# Altium PCB powermeter_Radio.PcbDoc
Units mm, origin at the board's own origin, x right, y up, seen from the top; angles counter-clockwise.
Board outline 27 x 38.5 mm, 2 copper layers (Top Layer, Bottom Layer); 30 components, 50 nets, 122 pads, 185 vias.
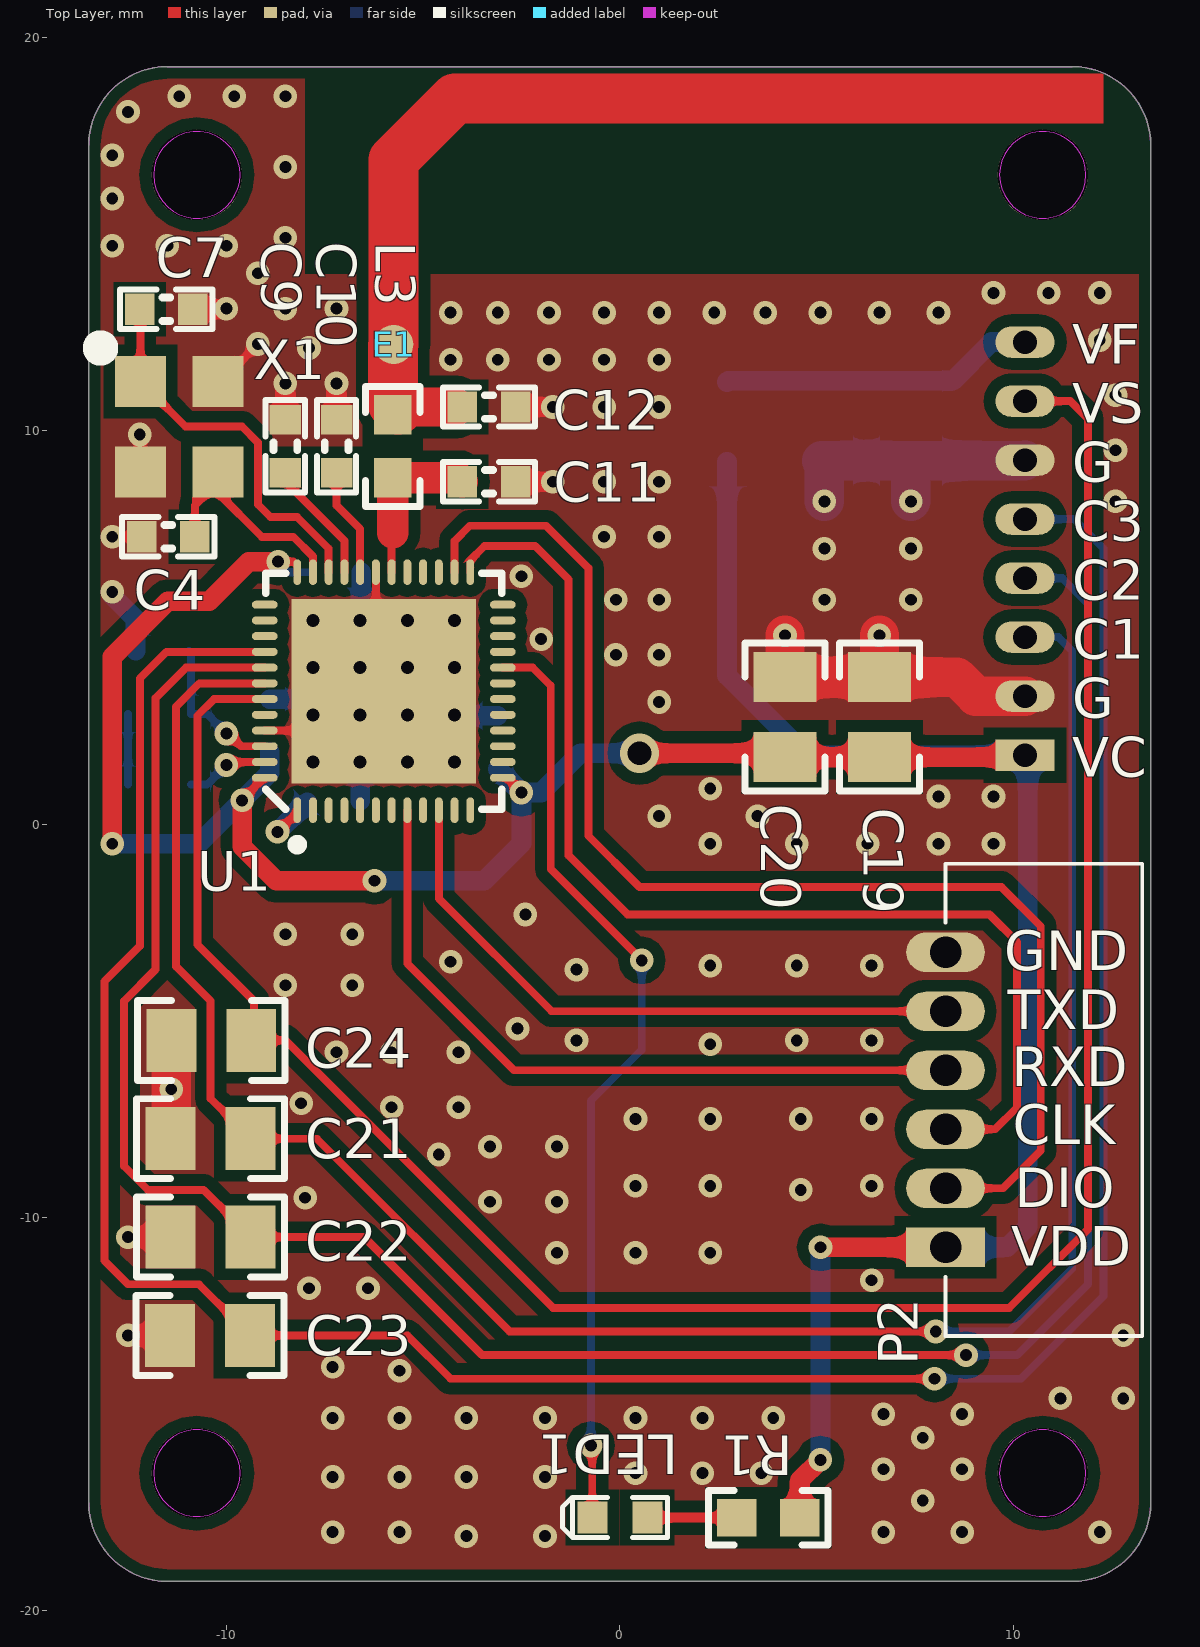
[diagram p0: Top Layer view]
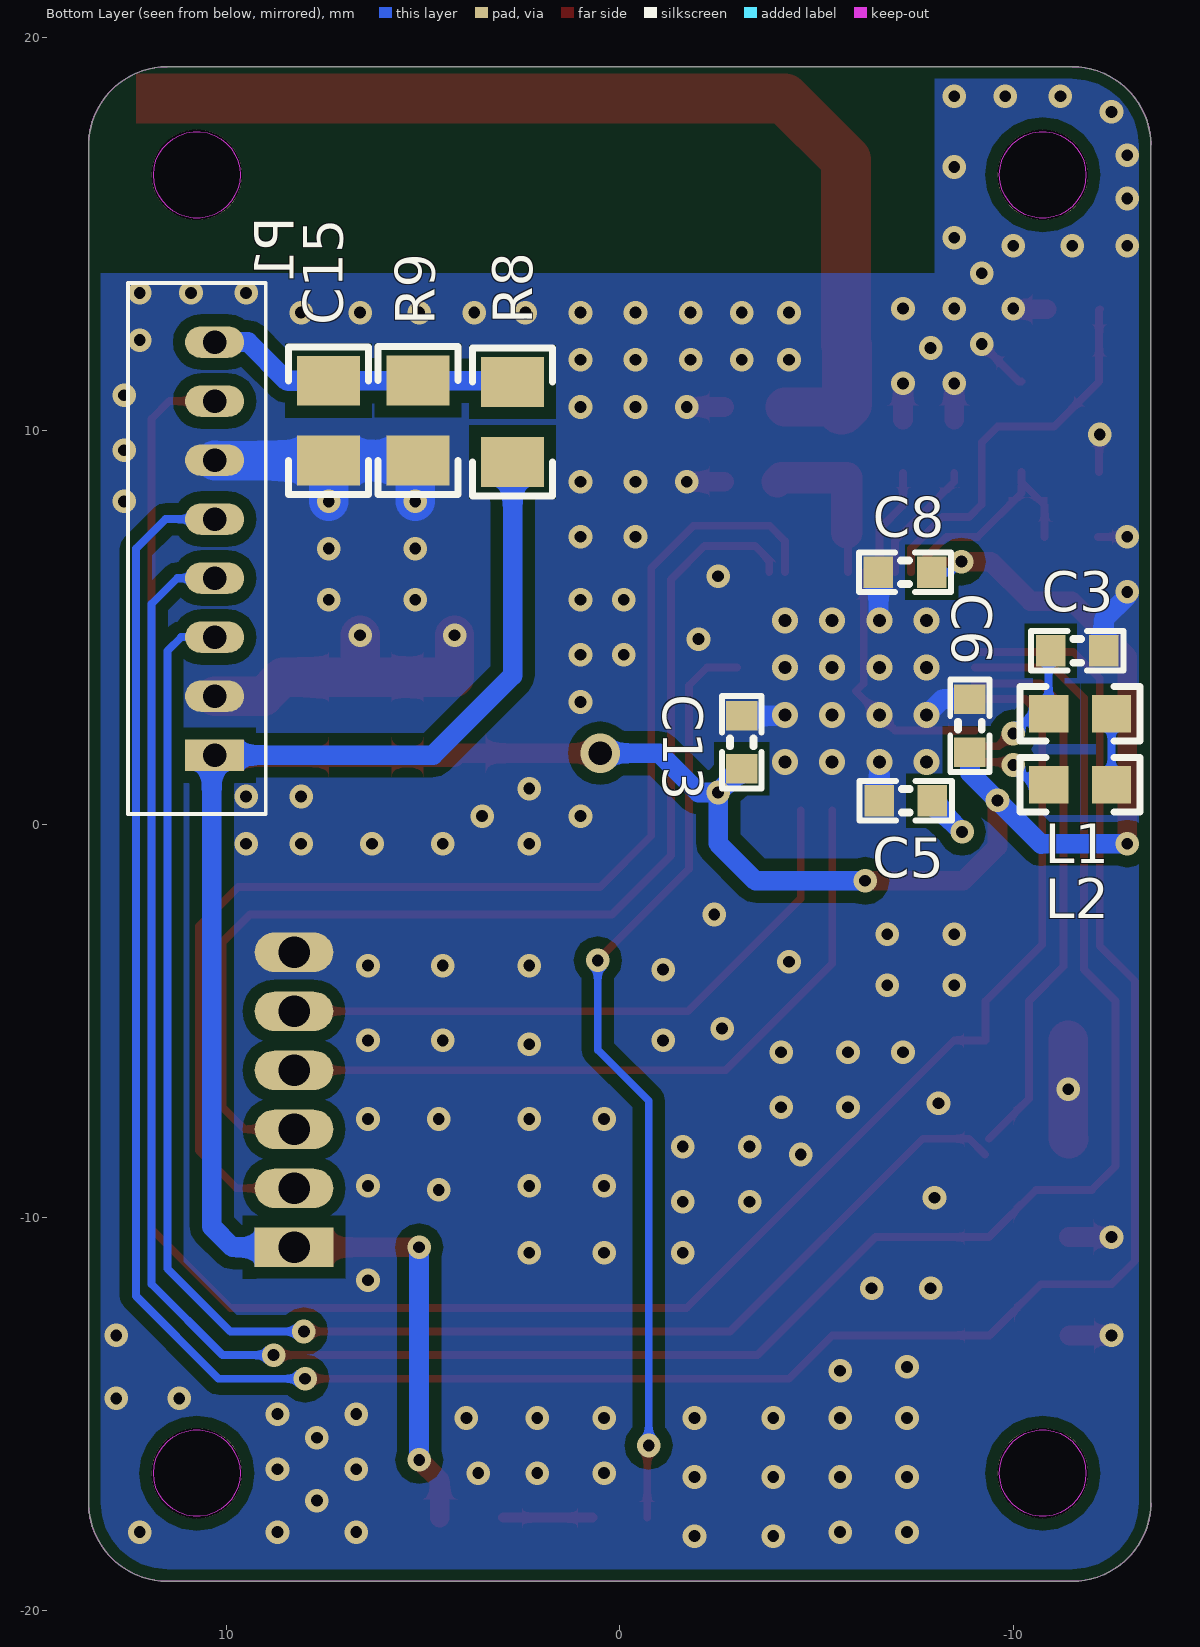
[diagram p1: Bottom Layer view, seen from below]

## Layer stack, top to bottom
Top Solder: solder mask 0.0102, Solder Resist, Dk 3.5
Top Layer: signal copper 0.0356
Dielectric 1: dielectric 0.32, FR-4, Dk 4.8
Bottom Layer: signal copper 0.0356
Bottom Solder: solder mask 0.0102, Solder Resist, Dk 3.5

## Board outline
-11.5,-19.25 cw(c-11.5,-17.25) -13.5,-17.25 -13.5,17.25 cw(c-11.5,17.25) -11.5,19.25 11.5,19.25 cw(c11.5,17.25) 13.5,17.25 13.5,-17.25 cw(c11.5,-17.25) 11.5,-19.25

## Design rules (kind name [scope] priority, off if disabled: settings)
Clearance polygon [IsRegion] p1: gap=0.3
Clearance [All] p2: gap=0.2
MinimumSolderMaskSliver [All] p1: minsoldermaskwidth=0.1
PolygonConnect [All] p1: connectstyle=Direct reliefconductorwidth=0.254 reliefentries=4 polygonreliefangle="90 Angle" airgapwidth=0.254
RoutingVias [All] p1: holewidth=0.3 width=0.6 viastyle="Through Hole" minholewidth=0.3 minwidth=0.6 maxholewidth=5 maxwidth=5
SilkToSilkClearance [All] p1: silktosilkclearance=0.1
SilkToSolderMaskClearance [IsPad] p1: minsilkscreentomaskgap=0.01 clearancetoexposedcopper=TRUE
SolderMaskExpansion [All] p1: expansion=0.102
Width [All] p1: maxlimit=5 minlimit=0.2 preferedwidth=0.254
27 further rules are at their usual default settings.

## Components (designator, comment, footprint, x,y, rotation, side; value= is the part's Value field where it differs from the comment)
C3 "1.0µF" CAPC1608X06L -11.625,4.4 r0 bottom
C4 "12pF" CAPC1608X06L -11.475,7.3 r180 top
C5 "100nF" CAPC1608X06L -7.27,0.59 r0 bottom
C6 "4.7µF" CAPC1608X06L -8.9,2.5 r90 bottom
C7 "12pF" CAPC1608X06L -11.528,13.083 r0 top
C8 "100nF" CAPC1608X06L -7.25,6.4 r0 bottom
C9 "100pF" CAPC1608X06L -8.5,9.6 r90 top
C10 "N.C." CAPC1608X06L -7.2,9.6 r90 top
C11 "0.8pF" CAPC1608X06L -3.325,8.7 r180 top
C12 "1.2pF" CAPC1608X06L -3.325,10.6 r0 top
C13 "100nF" CAPC1608X06L -3.1,2.075 r90 bottom
C15 "106" 0805_HV 7.404,10.251 r90 bottom
C19 "100nF" 0805_HV 6.6,2.716 r270 top
C20 "100nF" 0805_HV 4.2,2.716 r270 top
C21 "100nF" 0805_HV -10.4,-8 r0 top
C22 "100nF" 0805_HV -10.4,-10.5 r0 top
C23 "100nF" 0805_HV -10.416,-13 r0 top
C24 "100nF" 0805_HV -10.384,-5.5 r0 top
E1 "Antenna" nrfant -5.75,12.19 r0 top locked
L1 "15nH" 0603 -11.7,2.8 r180 bottom
L2 "10µH" 0603 -11.7,1 r0 bottom
L3 "3.9nH" 0603 -5.77,9.6 r90 top
LED1 "L0603G" LED_0603_G 0,-17.625 r0 top
P1 "Header 8" CON6_1.5D 10.3,1.75 r90 bottom locked
P2 "Header 6" CON6P-ZH1.5 8.28,-10.76 r90 top locked
R1 "220R" 0603 3.773,-17.632 r0 top
R8 "1K" 0805_HV 2.725,10.22 r270 bottom
R9 "2.2K" 0805_HV 5.133,10.253 r270 bottom
U1 "nRF52832-QFAA" QFN40P600X600X90-48N -6,3.375 r90 top locked
X1 "CX3225SB32000D0FFFCC" SON230P260X60-4N -11.2,10.1 r0 top locked

## Footprints (in the part's own frame and the unit in brackets; to place one, negate y for a bottom-side part, rotate by r counter-clockwise, add the part's x,y. Pads: shape width x height; smd on the part's side, far side on the other; paste and mask are expansions set on the pad)
0603 [mm] "0603 from SM-752 data"
  rect 1x0.95 smd: 1(-0.8,0) 2(0.8,0)
  silkscreen extent -1.52,-0.69 1.52,0.69, body extent -0.87,-0.47 0.87,0.47, height 1
0805_HV [mil] "0805 with 30mil clearance between pads"
  rect 50x63 smd: 1(-40,0) 2(40,0)
  silkscreen extent -74,-40 74,40, body extent -43,-29 43,29, height 57
CAPC1608X06L [mm]
  rect 0.75x0.8 smd: 1(-0.675,0) 2(0.675,0)
  silkscreen extent -1.17,-0.5 1.17,0.5, body extent -0.8,-0.43 0.8,0.43, height 0.8
CON6_1.5D [mm]
  rect 0.8x1.5 hole 0.6 paste+0: 1(0,0)
  oval 0.8x1.5 hole 0.6 paste+0: 2(1.5,0) 3(3,0) 4(4.5,0) 5(6,0) 6(7.5,0) 7(9,0) 8(10.5,0)
  silkscreen extent -1.5,-1.3 12,2.2
CON6P-ZH1.5 [mm] "CON6"
  rect 1x2 hole 0.8 paste+0: 1(0,0)
  oval 1x2 hole 0.8 paste+0: 2(1.5,0) 3(3,0) 4(4.5,0) 5(6,0) 6(7.5,0)
  silkscreen extent -2.25,-5 9.75,0
LED_0603_G [mil]
  rect 30x32 smd: 1(-27.5,0) 2(27.5,0)
  silkscreen extent -58,-20 48,20, body extent -32,-16 32,16, height 24
nrfant [mm]
  round 1 smd: 1(0,0)
  Top Layer region: 18.048,5.617 18.048,6.887 17.286,6.887 17.286,5.617
  Top Layer lines w1.27: 0,0 0,4.689 ; 17.401,6.248 1.559,6.248 1.559,6.248 0,4.689 ; 0,4.689 0,4.689
QFN40P600X600X90-48N [mm]
  oval 0.65x0.2 smd: 1(-3.025,2.2) 2(-3.025,1.8) 3(-3.025,1.4) 4(-3.025,1) 5(-3.025,0.6) 6(-3.025,0.2) 7(-3.025,-0.2) 8(-3.025,-0.6) 9(-3.025,-1) 10(-3.025,-1.4) 11(-3.025,-1.8) 12(-3.025,-2.2) 25(3.025,-2.2) 26(3.025,-1.8) 27(3.025,-1.4) 28(3.025,-1) 29(3.025,-0.6) 30(3.025,-0.2) 31(3.025,0.2) 32(3.025,0.6) 33(3.025,1) 34(3.025,1.4) 35(3.025,1.8) 36(3.025,2.2)
  oval 0.2x0.65 smd: 13(-2.2,-3.025) 14(-1.8,-3.025) 15(-1.4,-3.025) 16(-1,-3.025) 17(-0.6,-3.025) 18(-0.2,-3.025) 19(0.2,-3.025) 20(0.6,-3.025) 21(1,-3.025) 22(1.4,-3.025) 23(1.8,-3.025) 24(2.2,-3.025) 37(2.2,3.025) 38(1.8,3.025) 39(1.4,3.025) 40(1,3.025) 41(0.6,3.025) 42(0.2,3.025) 43(-0.2,3.025) 44(-0.6,3.025) 45(-1,3.025) 46(-1.4,3.025) 47(-1.8,3.025) 48(-2.2,3.025)
  rect 4.7x4.7 smd: 49(0,0)
  silkscreen extent -4.02,-3 3,3, body extent -3.02,-3.02 3.02,3.02, height 0.86
SON230P260X60-4N [mm] "SON, 4-Leads, Body 3.25x2.55mm, Pitch 2.30mm, IPC Medium Density"
  rect 1.3x1.3 smd: 1(-0.985,1.15) 2(-0.985,-1.15) 3(0.985,-1.15) 4(0.985,1.15)
  silkscreen extent -2.2,1.8 -1.8,2.2, body extent -1.3,-1.65 1.3,1.65, height 0.6

## Part data
C3: library part C0603-1µ0, "Capacitor, X7R, ±10%"
C4 C7: library part C0402-12p, "Capacitor, NP0, ±2%"
C5 C8 C13 C19 C20 C21 C22 C23 C24: library part C0402-100n, "Capacitor, X7R, ±10%"
C6: library part C0603-4µ7, "Capacitor, X5R, ±10%"
C9: library part C0402-100p, "Capacitor, NP0, ±5%"
C10: library part C0402-N.C., "Not mounted"
C11: library part C0402-0.8p, "Capacitor, NP0, ±5%"
C12: library part C0402-1.2p, "Capacitor, NP0, ±0.1pF"
C15: library part CM, "Cap SMD"
E1: "Generic Antenna"
L1: library part L0402-15n, "Inductor, 320mA, ±5%"
L2: library part L0603-10µ, "Inductor, 80mA, ±10%"
L3: library part L0402-3n9, "Inductor, 170mA, ±0.1nH"
LED1: library part "LG L29K Smartled Green", "LED SMARTLED GREEN 570NM 0603"
P1: "Header, 8-Pin"
P2: "Header, 6-Pin"
R1: library part R0402-220, "Resistor, ±1%, 0.063W"
R8 R9: library part R0402-100k, "Resistor, ±1%, 0.063W"
U1: "Multi-protocol Bluetooth Low Energy and 2.4GHz proprietary system-on-chip"
X1: library part XTAL_SMD2016_32MHz_8pF_Epson, "XTAL SMD 2016, 32MHz, Cl=8pF, Tol: ±10ppm, Stab: ±10ppm"

## Free pads (board coordinates)
  round 2.3 hole 2.3 paste+0: 0(-10.75,16.5) 1(10.75,16.5) 2(10.75,-16.5) 3(-10.75,-16.5)

## Via types
v1: diameter 0.6, hole 0.3, Top Layer to Bottom Layer, tented both sides, 168 vias
v2: diameter 0.66, hole 0.33, Top Layer to Bottom Layer, tented both sides, 16 vias
v3: diameter 1, hole 0.6, Top Layer to Bottom Layer, tented both sides, 1 vias

## Nets (pads, with @x,y where several pads share a name; then routed paths per layer and width w, separated by ;. In a path a pad name is that pad's centre, name@x,y a point inside that pad or via, vN(x,y) a via of type N, cw(c..) or ccw(c..) an arc to the next point about the centre after c; other vN are vias at no path point)
ANT: C12.1 E1.1 L3.2 | length 3.2
  Top Layer w1: L3.2@-5.635,10.535 -5.57,10.6 C12.1@-4.2,10.6
  Top Layer w1.27: E1.1 -5.77,12.17 -5.77,10.67 L3.2@-5.635,10.535
CTS: 
CURRENT_SIGNAL1: C21.2 P1.3 U1.42 | length 55
  Top Layer w0.2: C21.2 -10.4,-6.984 -10.4,-4.5 -11.281,-3.619 -11.281,2.982 -10.688,3.575 U1.42 ; C21.2@-9.284,-8.4 -8.884,-8 -7.7,-8 -2.8,-12.9 v1(8.029,-12.9)
  Bottom Layer w0.2: v1(8.029,-12.9) 9.9,-12.9 11.5,-11.3 11.5,4.4 11.15,4.75 P1.3
CURRENT_SIGNAL2: C22.2 P1.4 U1.41 | length 61.7
  Top Layer w0.2: U1.41 -11.025,3.975 -11.8,3.2 -11.8,-3.7 -12.6,-4.5 -12.6,-8.7 -12,-9.3 -10.584,-9.3 C22.2 -6.5,-10.5 -3.5,-13.5 v1(8.8,-13.5)
  Bottom Layer w0.2: v1(8.8,-13.5) 10.1,-13.5 11.9,-11.7 11.9,5.6 11.25,6.25 P1.4
CURRENT_SIGNAL3: C23.2 P1.5 U1.40 | length 67.5
  Top Layer w0.2: U1.40 -11.525,4.375 -12.2,3.7 -12.2,-3.1 -13.1,-4 -13.1,-11.1 -12.5,-11.7 -10.7,-11.7 C23.2 -5.4,-13 -4.3,-14.1 v1(8,-14.1)
  Bottom Layer w0.2: v1(8,-14.1) 10.2,-14.1 12.3,-12 12.3,7 11.55,7.75 P1.5
DEC1: C5.1 U1.1 | length 1.9
  Top Layer w0.2: v1(-8.7,-0.2) -8.2,0.3 U1.1
  Bottom Layer w0.2: C5.1@-7.945,0.555 C5.1
  Bottom Layer w0.5: v1(-8.7,-0.2) C5.1@-7.945,0.555
DEC2: C10.1 U1.32 | length 2.8
  Top Layer w0.2: C10.1 -7.2,8.1 -6.6,7.5 U1.32
DEC3: C9.1 U1.33 | length 3.1
  Top Layer w0.2: C9.1 -8.5,8.7 -7,7.2 U1.33
DEC4: C3.2 L1.1 U1.46 | length 3.8
  Top Layer w0.2: v1(-10,2.3) -9.951,2.3 -9.626,1.975 U1.46
  Bottom Layer w0.2: C3.2 -10.9,4.35 L1.1 -10.5,2.8 v1(-10,2.3)
GND: C3.1 C4.2 C5.2 C6.2 C7.2 C8.2 C9.2 C10.2 C11.1 C12.2 C13.2 C15.1 C19.1 C20.1 C21.1 C22.1 C23.1 C24.1 P1.2 P1.6 P2.6 R9.2 U1.31 U1.45 U1.49 X1.2 X1.4 | length 41
  Top Layer w0.2: v1(-12.9,7.3) C4.2 ; v1(-12.2,9.9) -12.185,9.885 X1.2 ; X1.4 -10.15,11.25 v1(-9.2,12.2) ; U1.45 -7,2.375 v2(-6.6,2.775) U1.49 -6.2,3.575 U1.31
  Top Layer w0.5: v1(-12.5,-13) C23.1 ; v1(-12.5,-10.5) C22.1 ; C7.2 -10.017,13.083 v1(-10,13.1) ; C9.2 v1(-8.5,11.2) ; C10.2 v1(-7.2,11.2) ; C11.1 v1(-1.7,8.7) ; C12.2 v1(-1.7,10.6)
  Top Layer w1: C21.1 -11.4,-7.984 v1(-11.4,-6.742) C24.1 ; v1(4.2,4.8) C20.1 C19.1 ; v1(6.6,4.8) C19.1 ; P1.2 9.05,3.25 8.568,3.732 C19.1
  Bottom Layer w0.5: v1(-12.9,5.9) -12.9,5.8 -12.3,5.2 C3.1 ; C6.2 -8.2,3.175 v2(-7.8,2.775) ; v2(-6.6,1.575) -6.595,1.57 C5.2 ; v2(-6.6,5.175) -6.575,5.2 C8.2 ; v2(-4.2,2.775) -4.175,2.75 C13.2
  Bottom Layer w1: v1(5.2,8.2) 5.2,9.17 R9.2 10.287,9.237 P1.6 ; v1(7.4,8.2) 7.4,9.231 C15.1
  other v1: -3.9,-18.1 -1.9,-18.1 -7.3,-18 -5.6,-18 6.7,-18 8.7,-18 12.2,-18 7.7,-17.2 -7.3,-16.6 -5.6,-16.6 -3.9,-16.6 -1.9,-16.6 0.4,-16.5 2.1,-16.5 3.6,-16.5 6.7,-16.4 8.7,-16.4 7.7,-15.6 -7.3,-15.1 -5.6,-15.1 -3.9,-15.1 -1.9,-15.1 0.4,-15.1 2.1,-15.1 3.9,-15.1 6.7,-15 8.7,-15 11.2,-14.6 12.8,-14.6 -5.6,-13.9 -7.3,-13.8 12.8,-13 -7.9,-11.8 -6.4,-11.8 6.4,-11.6 -1.6,-10.9 0.4,-10.9 2.3,-10.9 -3.3,-9.6 -1.6,-9.6 -8,-9.5 4.6,-9.3 0.4,-9.2 2.3,-9.2 6.4,-9.2 -4.6,-8.4 -3.3,-8.2 -1.6,-8.2 0.4,-7.5 2.3,-7.5 4.6,-7.5 6.4,-7.5 -5.8,-7.2 -4.1,-7.2 -8.1,-7.1 -7.2,-5.8 -5.8,-5.8 -4.1,-5.8 2.3,-5.6 -1.1,-5.5 4.5,-5.5 6.4,-5.5 -2.6,-5.2 -8.5,-4.1 -6.8,-4.1 -1.1,-3.7 2.3,-3.6 4.5,-3.6 6.4,-3.6 -4.3,-3.5 -8.5,-2.8 -6.8,-2.8 -2.4,-2.3 2.3,-0.5 4.5,-0.5 6.3,-0.5 8.1,-0.5 9.5,-0.5 1,0.2 3.5,0.2 8.1,0.7 9.5,0.7 2.3,0.9 1,3.1 -0.1,4.3 1,4.3 -2,4.7 -0.1,5.7 1,5.7 5.2,5.7 7.4,5.7 -2.5,6.3 5.2,7 7.4,7 -0.4,7.3 1,7.3 12.6,8.2 -0.4,8.7 1,8.7 12.6,9.5 -0.4,10.6 1,10.6 12.6,10.9 -4.3,11.8 -3.1,11.8 -1.8,11.8 -0.4,11.8 1,11.8 -7.9,12.1 12.2,12.3 -4.3,13 -3.1,13 -1.8,13 -0.4,13 1,13 2.4,13 3.7,13 5.1,13 6.6,13 8.1,13 -8.5,13.1 -7.2,13.1 9.5,13.5 10.9,13.5 12.2,13.5 -9.2,14 -12.9,14.7 -11.5,14.7 -10,14.7 -8.5,14.9 -12.9,15.9 -8.5,16.7 -12.9,17 -12.5,18.1 -11.2,18.5 -9.8,18.5 -8.5,18.5
  other v2: -7.8,1.575 -5.4,1.575 -4.2,1.575 -5.4,2.775 -7.8,3.975 -6.6,3.975 -5.4,3.975 -4.2,3.975 -7.8,5.175 -5.4,5.175 -4.2,5.175
LED1: LED1.1 U1.20 | length 24.1
  Top Layer w0.2: U1.20 -2.213,3.975 -1.755,3.517 -1.755,-1.145 0.591,-3.491 v1@0.591,-3.495 ; v1(-0.735,-15.798) -0.699,-15.834 LED1.1
  Bottom Layer w0.2: v1(-0.735,-15.798) -0.735,-7.035 0.559,-5.741 v1(0.559,-3.466)
NetC11_2: C11.2 L3.1 U1.30 | length 4.2
  Top Layer w0.2: U1.30 -5.8,7.27 -5.77,7.3 -5.77,7.4
  Top Layer w0.8: -5.77,7.4 L3.1 -4.1,8.8 C11.2
NetL1_2: L1.2 L2.1 | length 1.8
  Bottom Layer w0.2: L2.1 L1.2
NetL2_2: L2.2 U1.47 | length 2.1
  Top Layer w0.2: v1(-10,1.5) -9.925,1.575 U1.47
  Bottom Layer w0.2: L2.2 -10.5,1 v1(-10,1.5)
NetLED1_2: LED1.2 R1.1 | length 2.3
  Top Layer w0.254: LED1.2 0.705,-17.632 R1.1
P0.00: U1.2
P0.01: U1.3
P0.02: U1.4
P0.03: U1.5
P0.04: U1.6
P0.05: U1.7
P0.06: P2.4 U1.8 | length 18.7
  Top Layer w0.2: U1.8 -5.4,-3.548 -2.688,-6.26 P2.4
P0.07: U1.9
P0.08: P2.5 U1.10 | length 16.3
  Top Layer w0.2: U1.10 -4.6,-1.892 -1.732,-4.76 P2.5
P0.09/NFC1: U1.11
P0.10/NFC2: U1.12
P0.11: U1.14
P0.12: U1.15
P0.13: U1.16
P0.14: U1.17
P0.15: U1.18
P0.16: U1.19
P0.18: U1.21
P0.19: U1.22
P0.20: U1.23
P0.21: U1.24
P0.22: U1.27
P0.23: U1.28
P0.24: U1.29
P0.25: U1.37
P0.26: U1.38
P0.27: U1.39
P0.31: C24.2 P1.7 U1.43 | length 58
  Top Layer w0.2: U1.43 -10.312,3.175 -10.738,2.749 -10.738,-3.062 -9.3,-4.5 -9.3,-5.5 -8.5,-5.5 -1.7,-12.3 9.9,-12.3 11.9,-10.3 11.9,10.3 11.45,10.75 P1.7
RTS: 
SWDCLK: P2.3 U1.25 | length 28.9
  Top Layer w0.2: U1.25 -3.8,6.706 -3.436,7.07 -2.155,7.07 -1.3,6.215 -1.3,-0.8 0.2,-2.3 9.4,-2.3 10.1,-3 10.1,-7.2 9.54,-7.76 P2.3
SWDIO: P2.2 U1.26 | length 32.6
  Top Layer w0.2: U1.26 -4.2,7.191 -3.811,7.58 -1.874,7.58 -0.8,6.506 -0.8,-0.3 0.5,-1.6 9.7,-1.6 10.7,-2.6 10.7,-8.3 9.74,-9.26 P2.2
VDD_NRF: C6.1 C8.1 C13.1 C19.2 C20.2 P1.1 P2.1 R1.2 R8.2 U1.13 U1.36 U1.48 | length 81.2
  Top Layer w0.2: v1(-9.6,0.6) -9.6,0.616 -9.041,1.175 U1.48 ; v1(-8.685,6.67) -8.301,6.67 U1.36@-8.2,6.569 ; U1.36 U1.36@-8.2,6.569 ; U1.36@-8.2,6.6 U1.36@-8.2,6.569 ; U1.13 -2.875,1.175 v1(-2.5,0.8)
  Top Layer w0.5: v1(-12.9,-0.5) -12.9,4.251 -11.486,5.665 -10.435,5.665 -9.43,6.67 v1(-8.685,6.67) ; v1(-9.6,0.6) -9.6,-0.572 -8.728,-1.444 v1(-6.236,-1.444) ; v3(0.5,1.8) 4.1,1.8 C20.2 C19.2 10.25,1.7 P1.1 ; R1.2 4.573,-16.688 v1(5.098,-16.163) ; v1(5.102,-10.76) P2.1
  Bottom Layer w0.2: v1(-8.685,6.67) -8.415,6.4 C8.1
  Bottom Layer w0.5: v1(-12.9,-0.5) -10.724,-0.5 -10.712,-0.512 v1(-9.6,0.6) -8.9,1.3 C6.1 ; v1(-6.236,-1.444) -3.452,-1.444 -2.5,-0.492 v1(-2.5,0.8) ; C13.1 v1(-2.5,0.8) ; v3(0.5,1.8) -1,1.8 -2,0.8 v1(-2.5,0.8) ; R8.2 2.725,3.775 4.75,1.75 P1.1 10.372,1.678 10.372,-10.23 9.842,-10.76 P2.1 ; v1(5.098,-16.163) 5.102,-16.159 v1(5.102,-10.76)
VOFFSET_VOL: C15.2 P1.8 R8.1 R9.1 | length 8
  Bottom Layer w0.5: R8.1 2.756,11.267 C15.2 8.467,11.267 9.45,12.25 P1.8
XC1: C7.1 U1.34 X1.1 | length 9.9
  Top Layer w0.2: C7.1 -12.185,13.065 X1.1 -11.035,10.1 -9.6,10.1 -9.2,9.7 -9.2,8.126 -8.874,7.8 -8.2,7.8 -7.4,7 U1.34
XC2: C4.1 U1.35 X1.3 | length 5.5
  Top Layer w0.2: C4.1 -10.8,8.1 -10.215,8.685 X1.3 ; X1.3@-10.215,8.585 -10.215,8.415 -9.1,7.3 -8.3,7.3 -7.8,6.8 U1.35
pads on no net: U1.44

## Polygon pours and split planes (outlines as drawn)
GND on Bottom Layer "Bottom Layer-No Net" (solid, pour order 4): -8,19.2 -8.021,19.221 -11.892,19.221 -12.921,18.671 -13.5,17.613 -13.5,16.8 -13.5,-17.432 -12.921,-18.671 -11.696,-19.24 11.66,-19.24 13.171,-18.367 13.5,-17.4 13.5,-15.4 13.5,14 -0.3,14 -3,14 -4.3,14 -6.9,14 -8,14 -8,19.25
GND on Top Layer "Bottom Layer-No Net" (solid, pour order 3): -8.008,19.179 -8.029,19.2 -11.9,19.2 -12.929,18.65 -13.508,17.592 -13.508,16.779 -13.508,-17.453 -12.929,-18.692 -11.704,-19.261 11.652,-19.261 13.163,-18.388 13.492,-17.421 13.492,-15.421 13.492,13.979 -0.308,13.979 -3.008,13.979 -4.308,13.979 -6.908,13.979 -8.008,13.979 -8.008,19.229

## Keep-outs
Keep-Out Layer:
  circle w0.013: c-10.75,16.5 r1.1
  circle w0.013: c10.75,16.5 r1.1
  circle w0.013: c-10.75,-16.5 r1.1
  circle w0.013: c10.75,-16.5 r1.1
  lines w0.013: -13.5,-17.25 ccw(c-11.5,-17.25) -11.5,-19.25 11.5,-19.25 ccw(c11.5,-17.25) 13.5,-17.25 13.5,17.25 ccw(c11.5,17.25) 11.5,19.25 -11.5,19.25 ccw(c-11.5,17.25) -13.5,17.25 -13.5,-17.25

## Silkscreen, mask and mechanical layers (free items; w line width, h text height)
Top Overlay:
  text "VF" at 11.5,11.7 h1
  text "VS" at 11.5,10.2 h1
  text "G" at 11.5,8.7 h1
  text "C3" at 11.5,7.2 h1
  text "C2" at 11.5,5.7 h1
  text "C1" at 11.5,4.2 h1
  text "G" at 11.5,2.7 h1
  text "VC" at 11.5,1.2 h1
  text "GND" at 9.77,-3.72 h1
  text "TXD" at 9.86,-5.22 h1
  text "RXD" at 9.96,-6.66 h1
  text "CLK" at 9.99,-8.14 h1
  text "DIO" at 10.04,-9.74 h1
  text "VDD" at 9.95,-11.23 h1
Mechanical 1:
  lines w0.1: 0,-19.255 0,19.255 ; 0,19.255 0,19.255
Mechanical 2:
  circle w0.013: c10.3,9.25 r0.35
  circle w0.013: c10.3,7.75 r0.35
  circle w0.013: c10.3,10.75 r0.35
  circle w0.013: c10.3,12.25 r0.35
  circle w0.013: c10.3,4.75 r0.35
  circle w0.013: c10.3,3.25 r0.35
  circle w0.013: c10.3,1.75 r0.35
  circle w0.013: c10.3,6.25 r0.35
  lines w0.01: -1,-17.625 1,-17.625
  lines w0.013: -1,-18.125 cw(c-1,-18.25) -0.875,-18.25 -0.725,-18.25 -0.65,-18.25 -0.614,-18.25 -0.515,-18.25 0.515,-18.25 0.614,-18.25 0.65,-18.25 0.725,-18.25 0.875,-18.25 cw(c1,-18.25) 1,-18.125 1,-17.975 1,-17.275 1,-17.125 cw(c1,-17) 0.875,-17 0.725,-17 0.65,-17 0.614,-17 0.515,-17 -0.515,-17 -0.614,-17 -0.65,-17 -0.725,-17 -0.875,-17 cw(c-1,-17) -1,-17.125 -1,-17.275 -1,-17.975 -1,-18.125 ; -1,17.125 cw(c-1,17) -0.875,17 -0.725,17 -0.65,17 -0.614,17 -0.515,17 0.515,17 0.614,17 0.65,17 0.725,17 0.875,17 cw(c1,17) 1,17.125 1,17.275 1,17.975 1,18.125 cw(c1,18.25) 0.875,18.25 0.725,18.25 0.65,18.25 0.614,18.25 0.515,18.25 -0.515,18.25 -0.614,18.25 -0.65,18.25 -0.725,18.25 -0.875,18.25 cw(c-1,18.25) -1,18.125 -1,17.975 -1,17.275 -1,17.125 ; 9,0.25 9,13.75 12.5,13.75 12.5,0.25 9,0.25